# Altium PCB ZZ201PV02.PCBDOC
Units mil, origin at the board's own origin, x right, y up, seen from the top; angles counter-clockwise.
Board outline 2362.2 x 1771.65 mil, 2 copper layers (Top Layer, Bottom Layer); 60 components, 62 nets, 272 pads, 133 vias.
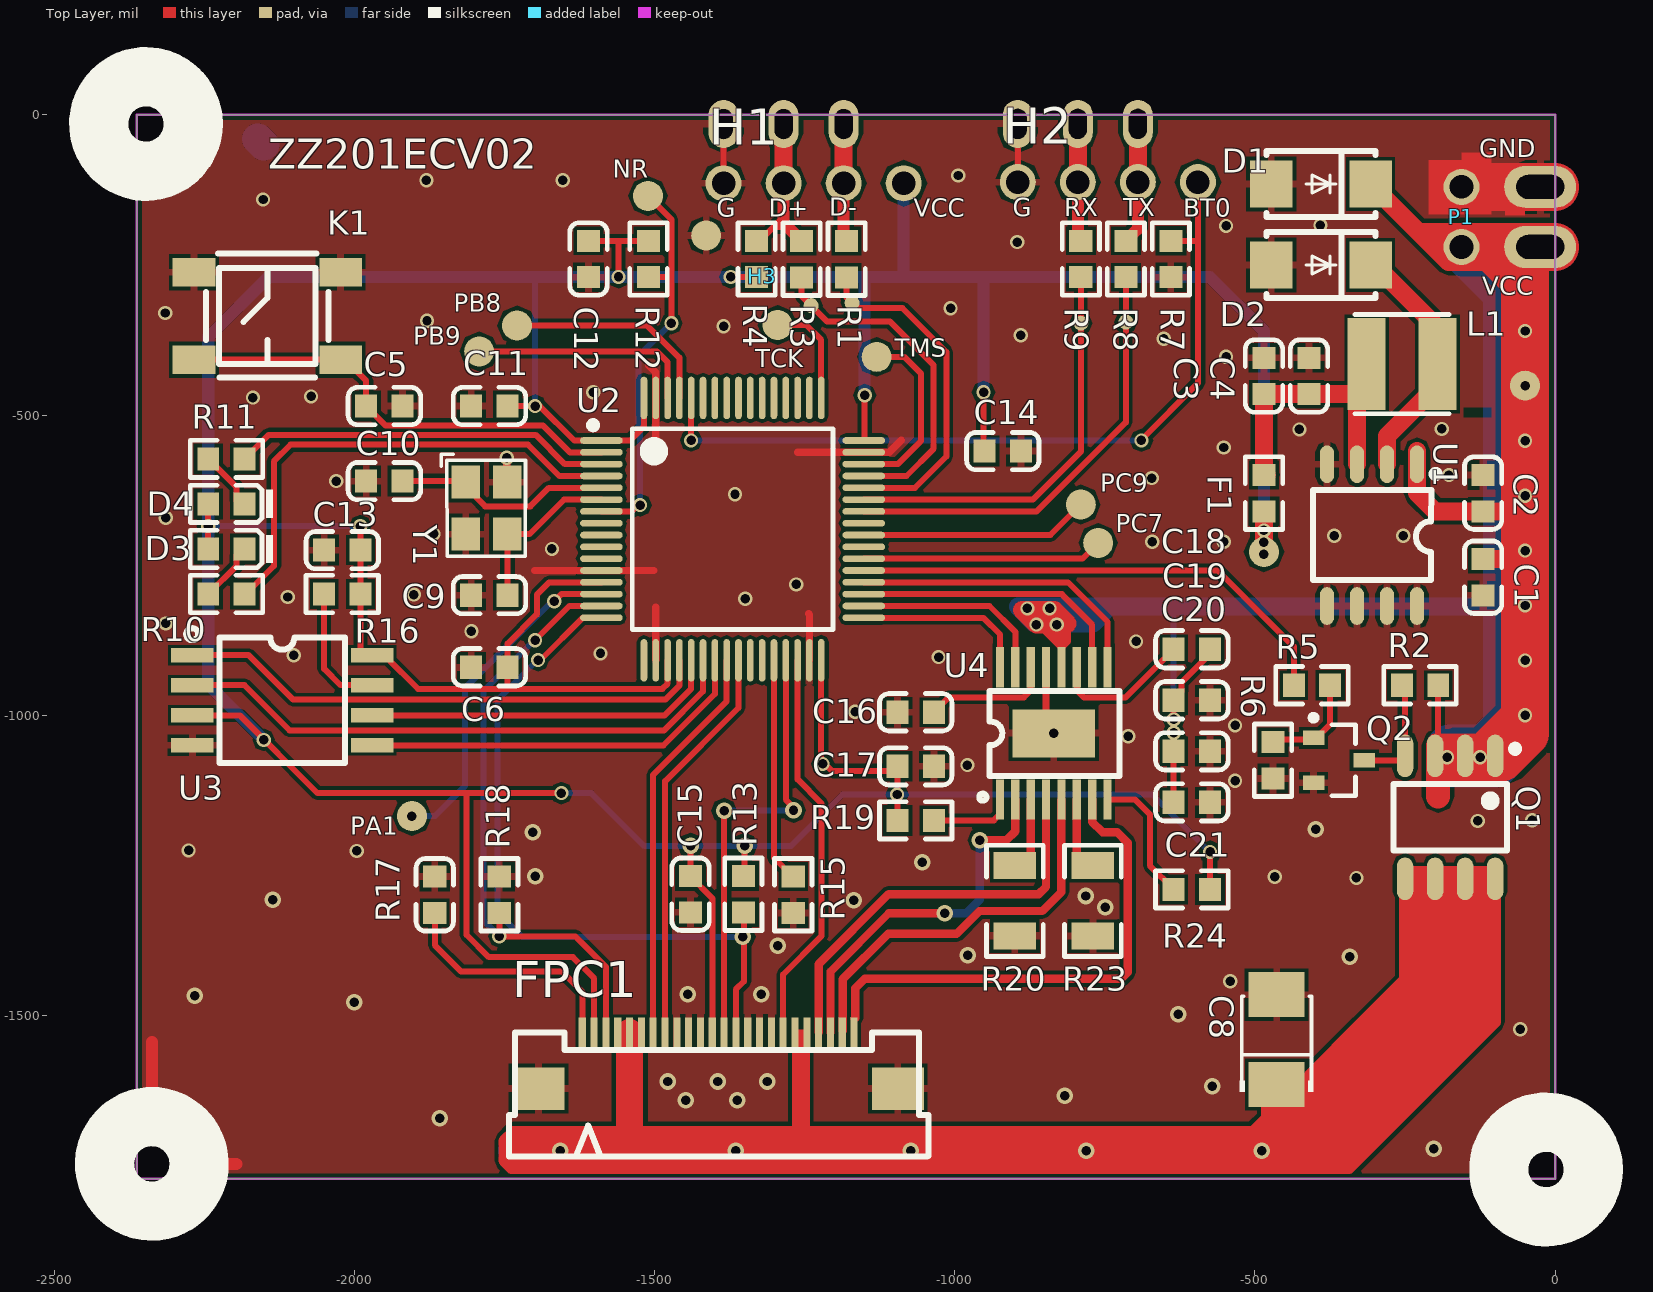
[diagram p0: Top Layer view]
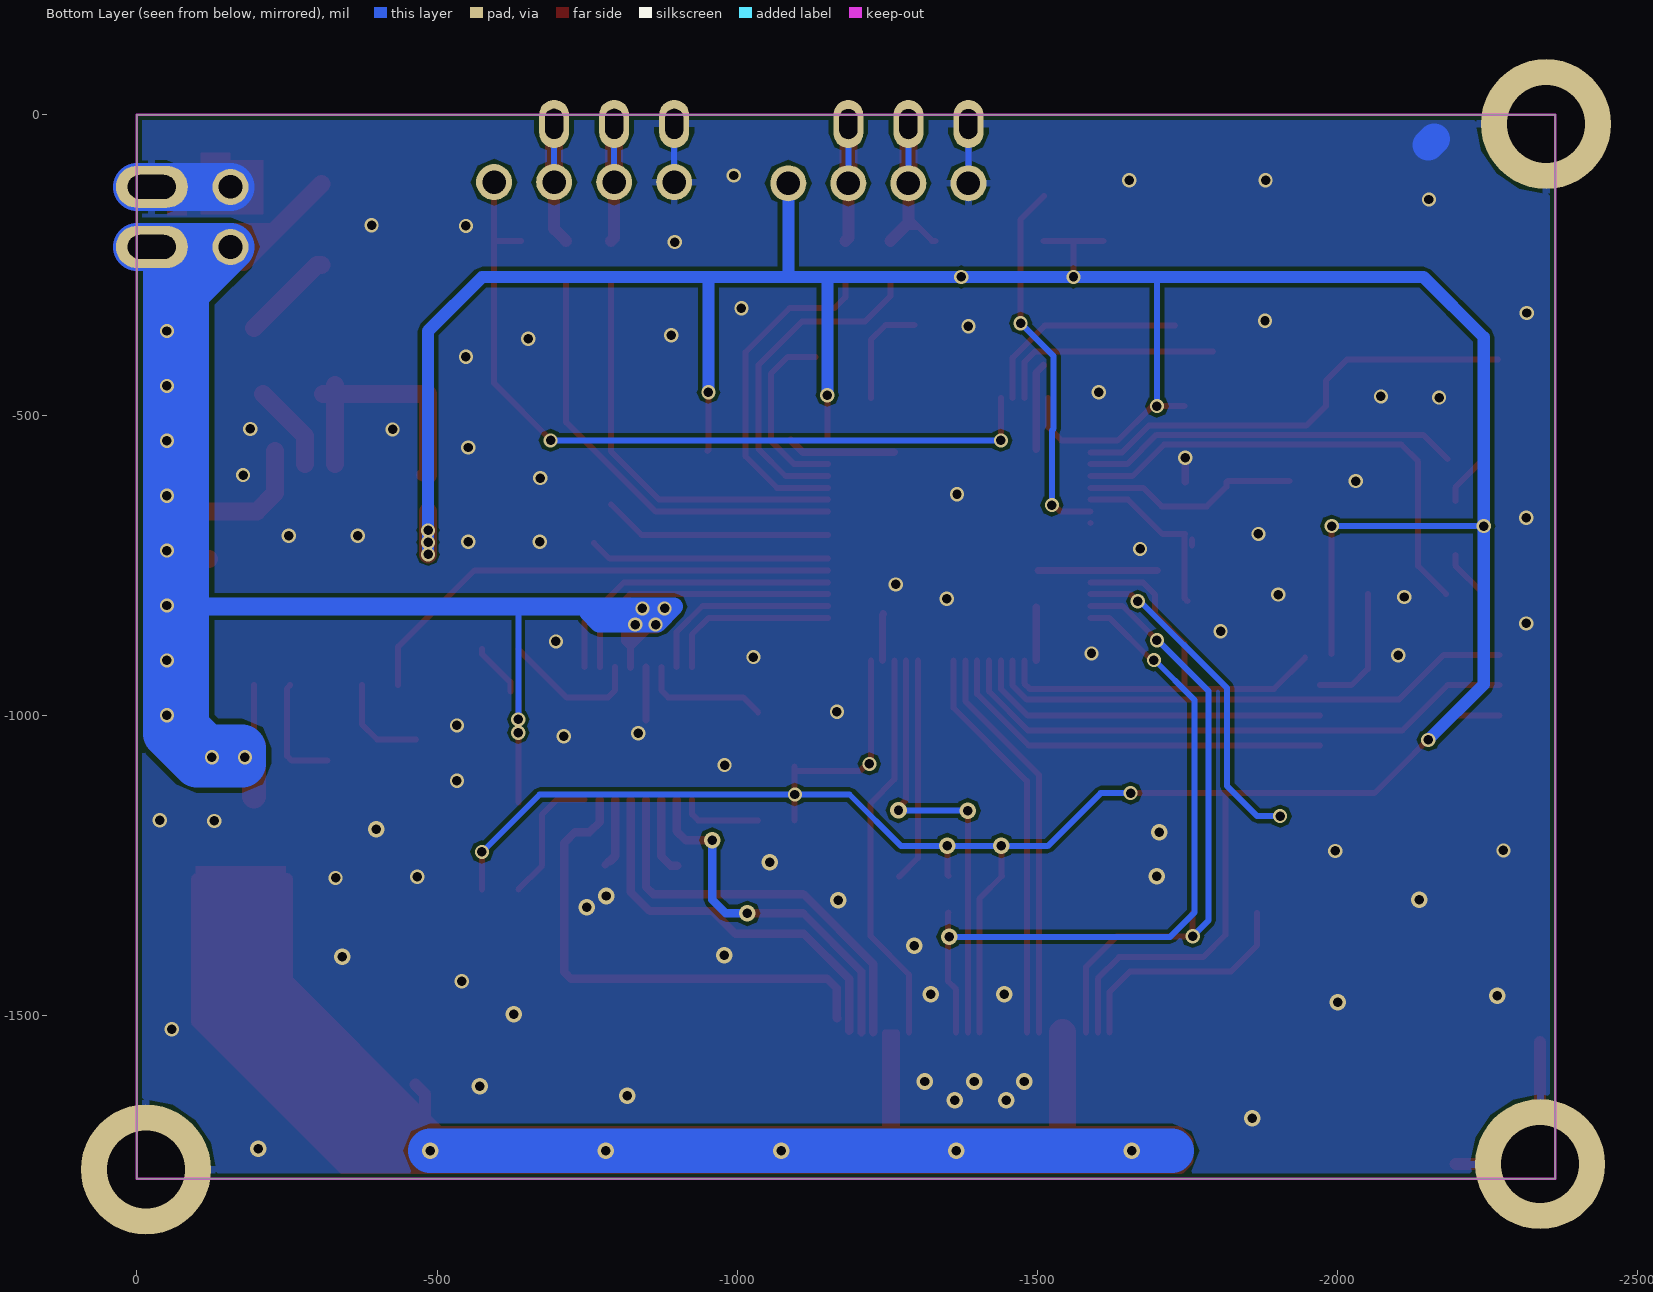
[diagram p1: Bottom Layer view, seen from below]

## Layer stack, top to bottom
Top Layer: signal copper 1.4
Dielectric: dielectric 12.6, FR-4, Dk 4.8
Bottom Layer: signal copper 1.4

## Board outline
-2362.2,-1771.65 -2362.2,0 0,0 0,-1771.65

## Design rules (kind name [scope] priority, off if disabled: settings)
Clearance [All] p1: gap=6
ComponentClearance [All] p1 off: gap=10 collisioncheckmode=3 verticalgap=10
DiffPairsRouting DiffPair_DiffPairsRouting_3 [InDifferentialPair ('NewDifferentialPair1')] p1: maxlimit=10 minlimit=10 mostfreqgap=10 maxuncoupledlength=500
DiffPairsRouting DiffPair_DiffPairsRouting_2 [InDifferentialPair ('NewDifferentialPair1')] p2: maxlimit=5 minlimit=5 mostfreqgap=5 maxuncoupledlength=500
DiffPairsRouting DiffPair_DiffPairsRouting_1 [InDifferentialPair ('NewDifferentialPair1')] p3: maxlimit=10 minlimit=10 mostfreqgap=10 maxuncoupledlength=500
DiffPairsRouting DiffPairsRouting_2 [InDifferentialPair ('NewDifferentialPair1')] p4: maxlimit=10 minlimit=10 mostfreqgap=10 maxuncoupledlength=500
DiffPairsRouting DiffPair_DiffPairsRouting [InDifferentialPair ('NewDifferentialPair1')] p5: maxlimit=10 minlimit=10 mostfreqgap=10 maxuncoupledlength=500
DiffPairsRouting DiffPairsRouting_1 [InDifferentialPair ('NewDifferentialPair1')] p6: maxlimit=10 minlimit=10 mostfreqgap=10 maxuncoupledlength=500
DiffPairsRouting [All] p7: maxlimit=10 minlimit=10 mostfreqgap=10 maxuncoupledlength=500
HoleSize Testpoint [All] p2: absolutevalues=TRUE maxlimit=100 minlimit=1 maxpercent=80.000 minpercent=20.000
HoleSize TestPointUsage [All] p3: absolutevalues=TRUE maxlimit=100 minlimit=1 maxpercent=80.000 minpercent=20.000
MatchedLengths DiffPair_MatchedLengths_3 [InDifferentialPair ('NewDifferentialPair1')] p1: tolerance=10000 checknetsindiffpair=TRUE checkdiffpairvsdiffpair=FALSE checkothers=FALSE
MatchedLengths DiffPair_MatchedLengths_2 [InDifferentialPair ('NewDifferentialPair1')] p2: tolerance=10000 checknetsindiffpair=TRUE checkdiffpairvsdiffpair=FALSE checkothers=FALSE
MatchedLengths DiffPair_MatchedLengths_1 [InDifferentialPair ('NewDifferentialPair1')] p3: tolerance=10000 checknetsindiffpair=TRUE checkdiffpairvsdiffpair=FALSE checkothers=FALSE
MatchedLengths MatchedLengths_1 [InDifferentialPair ('NewDifferentialPair1')] p4: tolerance=1000 checknetsindiffpair=TRUE checkdiffpairvsdiffpair=FALSE checkothers=FALSE
MatchedLengths DiffPair_MatchedLengths [InDifferentialPair ('NewDifferentialPair1')] p5: tolerance=10000 checknetsindiffpair=TRUE checkdiffpairvsdiffpair=FALSE checkothers=FALSE
MatchedLengths [InDifferentialPair ('NewDifferentialPair1')] p6: tolerance=1000 checknetsindiffpair=TRUE checkdiffpairvsdiffpair=FALSE checkothers=FALSE
PolygonConnect PolygonConnect_1 [InNet('GND') vs IsVia] p1: connectstyle=Direct reliefconductorwidth=10 reliefentries=4 polygonreliefangle="90 Angle"
PolygonConnect [All] p2: connectstyle=Relief reliefconductorwidth=12 reliefentries=4 polygonreliefangle="90 Angle"
RoutingVias [All] p1: holewidth=16 width=26 viastyle="Through Hole" minholewidth=16 minwidth=24 maxholewidth=50 maxwidth=100
SolderMaskExpansion [All] p1: expansion=4
TestPointUsage FabricationTestPointUsage [All] p1: valid=0 allowmultiple=FALSE
Testpoint FabricationTestpoint [All] p1: side=3 testpointundercomponent=TRUE minsize=40 maxsize=100 preferedsize=60 minholesize=0 maxholesize=40 preferedholesize=32 testpointgrid=1 style=297 order=0-112345678
Width DiffPair_Width_3 [InDifferentialPair('NewDifferentialPair1')] p1: maxlimit=5 minlimit=5 preferedwidth=5
Width DiffPair_Width_2 [InDifferentialPair('NewDifferentialPair1')] p2: maxlimit=5 minlimit=5 preferedwidth=5
Width DiffPair_Width_1 [InDifferentialPair('NewDifferentialPair1')] p3: maxlimit=5 minlimit=5 preferedwidth=5
Width Width_2 [InDifferentialPair('NewDifferentialPair1')] p4: maxlimit=10 minlimit=10 preferedwidth=10
Width DiffPair_Width [InDifferentialPair('NewDifferentialPair1')] p5: maxlimit=5 minlimit=5 preferedwidth=5
Width Width_1 [InDifferentialPair('NewDifferentialPair1')] p6: maxlimit=10 minlimit=10 preferedwidth=10
Width [All] p7: maxlimit=100 minlimit=2 preferedwidth=6
17 further rules are at their usual default settings.

## Components (designator, comment, footprint, x,y, rotation, side; value= is the part's Value field where it differs from the comment)
C1 "10uF" 0603_C -120,-770 r270 top
C2 "100nF" 0603_C -120,-630 r90 top
C3 "100nF" 0603_C -485,-435 r90 top
C4 "10uF" 0603_C -410,-435 r90 top
C5 "100nF" 0603_C -1950,-485 r0 top
C6 "100nF" 0603_C -1775,-920 r0 top
C8 "220uF" CASE-B_3528 -445,-1508 r270 top
C9 "20pF" 0603_C -1775,-800 r0 top
C10 "20pF" 0603_C -1950,-610 r0 top
C11 "100nF" 0603_C -1775,-485 r0 top
C12 "100nF" 0603_C -1610,-240 r90 top
C13 "100nF" 0603_C -2020,-725 r0 top
C14 "100nF" 0603_C -920,-560 r180 top
C15 "100nF" 0603_C -1440,-1298 r90 top
C16 "2.2uF" 0603_C -1065,-995 r180 top
C17 "100nF" 0603_C -1065,-1085 r180 top
C18 "10nF" 0603_C -605,-890 r0 top
C19 "10uF" 0603_C -605,-975 r180 top
C20 "10uF" 0603_C -605,-1060 r180 top
C21 "100nF" 0603_C -605,-1145 r180 top
D1 "SS34" SMA_L4.4-W2.8-LS5.4-RD -390,-115 r180 top
D2 "SS34" SMA_L4.4-W2.8-LS5.4-RD -390,-250 r180 top
D3 "绿灯 0603" 0603_LED_S1 -2213,-723 r180 top
D4 "红灯 0603" 0603_LED_S1 -2213,-648 r180 top
F1 "0.5A" 0603_R -485,-630 r90 top
FPC1 "afc07-s24eca-00" FPC-SMD_24P-P0.50_F0500WR-S-24PNLNG1GB0R -1394,-1575 r0 top (schematic designator FPC?)
H1 "77311-462K05LF" "PCBComponent_1 - duplicate" -1200,-114 r180 top
H2 "77311-462K05LF" "PCBComponent_1 - duplicate" -710,-112 r180 top
H3 "77311-462K05LF" 5P_1.25 -1765,-195 r0 top
K1 "SW-SPST-4" KEY-SMD_4P-L5.2-W5.2-P3.70-LS6.4 -2145,-335 r180 top
L1 "4040-47uH" IND-SMD_L4.0-W4.0_FNR40XXS -255,-415 r0 top
P1 "Header-Female-2.54_1x2" 2P-P2.54-V -155,-120 r270 top
Q1 "NCE30P12S" SOIC-8_150mil -175,-1170 r180 top
Q2 "AO3402" SOT-23 -360,-1075 r0 top
R1 "20Ω" 0603_R -1180,-240.31 r270 top
R2 "47KΩ" 0603_R -225,-950 r0 top
R3 "20Ω" 0603_R -1255,-240.31 r270 top
R4 "1.5KΩ" 0603_R -1330,-240 r90 top
R5 "1KΩ" 0603_R -405,-950 r180 top
R6 "4.7KΩ" 0603_R -470,-1075 r90 top
R7 "4.7KΩ" 0603_R -640,-240 r270 top
R8 "20Ω" 0603_R -715,-240 r270 top
R9 "20Ω" 0603_R -790,-240 r270 top
R10 "2.2KΩ" 0603_R -2213,-798 r0 top
R11 "470Ω" 0603_R -2213,-573 r0 top
R12 "4.7KΩ" 0603_R -1510,-240 r270 top
R13 "56KΩ" 0603_R -1352,-1298 r90 top
R15 "4.7KΩ" 0603_R -1269,-1299 r90 top
R16 "4.7KΩ" 0603_R -2020,-798 r0 top
R17 "220Ω" 0603_C -1866,-1299 r270 top
R18 "30KΩ" 0603_R -1758.5,-1299 r90 top
R19 "10KΩ" 0603_R -1065,-1175 r180 top
R20 "0.4Ω 1%" 1206_r -900,-1309 r270 top
R23 "0.4Ω 1%" 1206_R -770,-1309 r270 top
R24 "10KΩ" 0603_R -605,-1290 r0 top
U1 "XL1509-3.3E1" SOP-8_L4.9-W3.9-P1.27-LS6.0-BL -305,-700 r180 top
U2 "STM32F103RET6" LQFP-64_L10.0-W10.0-P0.50-LS12.0-BL -1370,-690 r270 top locked
U3 "GT23L24M0140" SOP-8_L5.3-W5.3-P1.27-LS8.0-BL -2120,-975 r270 top
U4 "PT5139-HT-TP" HTSSOP-16_L5.0-W4.4-P0.65-LS6.4-BL-EP -835,-1030 r0 top
Y1 "8MHz" XT_3225_4 -1790,-645 r270 top

## Footprints (in the part's own frame and the unit in brackets; to place one, negate y for a bottom-side part, rotate by r counter-clockwise, add the part's x,y. Pads: shape width x height; smd on the part's side, far side on the other; paste and mask are expansions set on the pad)
2P-P2.54-V [mil]
  round 60 hole 39.37: 1(0,-1) 2(100,-1)
5P_1.25 [mil]
  round 50 smd paste+0 mask+1.97: 1(254,60) 2(470,-155) 3(351,-6) 4(635,-208)
0603_C [mm]
  rect 0.93x0.98 smd: 1(-0.77,0) 2(0.77,0)
  silkscreen extent -1.53,-0.79 1.54,0.79, body extent -0.8,-0.4 0.8,0.4, height 0.3
0603_LED_S1 [mm]
  rect 0.93x0.98 smd: A(0.77,0) K(-0.77,0)
  silkscreen extent -1.98,-0.79 1.54,0.79, body extent -0.8,-0.4 0.8,0.4, height 0.6
0603_R [mm]
  rect 0.93x0.98 smd: 1(-0.77,0) 2(0.77,0)
  silkscreen extent -1.53,-0.79 1.54,0.79, body extent -0.85,-0.4 0.85,0.4, height 0.56
1206_r [mm]
  rect 1.13x1.8 smd: 1(-1.49,0) 2(1.49,0)
  silkscreen extent -2.36,-1.2 2.35,1.2, body extent -1.7,-0.86 1.65,0.87, height 0.85
1206_R [mm]
  rect 1.13x1.8 smd: 1(-1.49,0) 2(1.49,0)
  silkscreen extent -2.36,-1.2 2.35,1.2, body extent -1.7,-0.86 1.65,0.87, height 0.85
CASE-B_3528 [mm]
  rect 1.9x2.376 smd: 1(2.715,-0.48) 2(-1.082,-0.48)
  silkscreen extent -1.01,-2.03 3.02,1.07
FPC-SMD_24P-P0.50_F0500WR-S-24PNLNG1GB0R [mm]
  rect 0.3x1.25 smd: 1(-5.75,1.187) 2(-5.25,1.187) 3(-4.75,1.187) 4(-4.25,1.187) 5(-3.75,1.187) 6(-3.25,1.187) 7(-2.75,1.187) 8(-2.25,1.187) 9(-1.75,1.187) 10(-1.25,1.187) 11(-0.75,1.187) 12(-0.25,1.187) 13(0.25,1.187) 14(0.75,1.187) 15(1.25,1.187) 16(1.75,1.187) 17(2.25,1.187) 18(2.75,1.187) 19(3.25,1.187) 20(3.75,1.187) 21(4.25,1.187) 22(4.75,1.187) 23(5.25,1.187) 24(5.75,1.187)
  rect 2.202x1.798 smd: 25(7.6,-1.187) 26(-7.6,-1.187)
  silkscreen extent -8.85,-4.06 8.89,1.19
HTSSOP-16_L5.0-W4.4-P0.65-LS6.4-BL-EP [mm]
  rect 0.35x1.7 smd: 1(-2.28,-2.804) 2(-1.629,-2.804) 3(-0.979,-2.804) 4(-0.329,-2.804) 5(0.321,-2.804) 6(0.971,-2.804) 7(1.621,-2.804) 8(2.271,-2.804) 9(2.272,2.796) 10(1.624,2.796) 11(0.974,2.796) 12(0.324,2.796) 13(-0.326,2.796) 14(-0.977,2.796) 15(-1.627,2.796) 16(-2.277,2.796)
  rect 3.5x2.032 smd: 17(0,0)
  silkscreen extent -3.15,-2.85 2.77,1.8
IND-SMD_L4.0-W4.0_FNR40XXS [mm]
  rect 1.6x3.9 smd: 1(-1.5,0) 2(1.5,0)
  silkscreen extent -2,-2.1 2,2.1
KEY-SMD_4P-L5.2-W5.2-P3.70-LS6.4 [mm]
  rect 1.8x1.2 smd: 1(-3.1,1.85) 2(3.1,1.85) 3(-3.1,-1.85) 4(3.1,-1.85)
  silkscreen extent -2.6,-2.65 2.6,2.6
LQFP-64_L10.0-W10.0-P0.50-LS12.0-BL [mm]
  oval 0.28x1.8 smd: 1(-3.75,-5.55) 2(-3.25,-5.55) 3(-2.75,-5.55) 4(-2.25,-5.55) 5(-1.75,-5.55) 6(-1.25,-5.55) 7(-0.75,-5.55) 8(-0.25,-5.55) 9(0.25,-5.55) 10(0.75,-5.55) 11(1.25,-5.55) 12(1.75,-5.55) 13(2.25,-5.55) 14(2.75,-5.55) 15(3.25,-5.55) 16(3.75,-5.55) 33(3.75,5.55) 34(3.25,5.55) 35(2.75,5.55) 36(2.25,5.55) 37(1.75,5.55) 38(1.25,5.55) 39(0.75,5.55) 40(0.25,5.55) 41(-0.25,5.55) 42(-0.75,5.55) 43(-1.25,5.55) 44(-1.75,5.55) 45(-2.25,5.55) 46(-2.75,5.55) 47(-3.25,5.55) 48(-3.75,5.55)
  oval 1.8x0.28 smd: 17(5.55,-3.75) 18(5.55,-3.25) 19(5.55,-2.75) 20(5.55,-2.25) 21(5.55,-1.75) 22(5.55,-1.25) 23(5.55,-0.75) 24(5.55,-0.25) 25(5.55,0.25) 26(5.55,0.75) 27(5.55,1.25) 28(5.55,1.75) 29(5.55,2.25) 30(5.55,2.75) 31(5.55,3.25) 32(5.55,3.75) 49(-5.55,3.75) 50(-5.55,3.25) 51(-5.55,2.75) 52(-5.55,2.25) 53(-5.55,1.75) 54(-5.55,1.25) 55(-5.55,0.75) 56(-5.55,0.25) 57(-5.55,-0.25) 58(-5.55,-0.75) 59(-5.55,-1.25) 60(-5.55,-1.75) 61(-5.55,-2.25) 62(-5.55,-2.75) 63(-5.55,-3.25) 64(-5.55,-3.75)
  silkscreen extent -4.55,-6.05 4.25,4.25
"PCBComponent_1 - duplicate" [mil]
  round 60 hole 39.37: 1(-115,0) 2(-15,0) 3(85,0) 4(185,0)
SMA_L4.4-W2.8-LS5.4-RD [mm]
  rect 1.8x2 smd: 1(2.1,0) 2(-2.1,0)
  silkscreen extent -2.3,-1.4 2.3,1.4
SOIC-8_150mil [mm]
  oval 0.7x1.8 smd: 1(-1.905,-2.6) 2(-0.635,-2.6) 3(0.635,-2.6) 4(1.905,-2.6) 5(1.905,2.6) 6(0.635,2.6) 7(-0.635,2.6) 8(-1.905,2.6)
  silkscreen extent -2.9,-3.05 2.4,1.4
SOP-8_L4.9-W3.9-P1.27-LS6.0-BL [mm]
  oval 0.6x1.598 smd: 1(-1.905,-3) 2(-0.635,-3) 3(0.635,-3) 4(1.905,-3) 5(1.905,3) 6(0.635,3) 7(-0.635,3) 8(-1.905,3)
  silkscreen extent -2.84,-2.74 2.5,1.9
SOP-8_L5.3-W5.3-P1.27-LS8.0-BL [mm]
  rect 0.599x1.8 smd: 1(-1.905,-3.8) 2(-0.635,-3.8) 3(0.635,-3.8) 4(1.905,-3.8) 5(1.905,3.8) 6(0.635,3.8) 7(-0.635,3.8) 8(-1.905,3.8)
  silkscreen extent -3.05,-4.06 2.65,2.65
SOT-23 [mm]
  rect 0.914x0.6 smd: 1(-1.075,0.95) 2(-1.075,-0.95) 3(1.075,0)
  silkscreen extent -1.2,-1.5 0.7,1.92
XT_3225_4 [mm]
  rect 1.4x1.2 smd: 1(-0.846,-0.621) 2(1.354,-0.621) 3(1.354,1.129) 4(-0.846,1.129)
  silkscreen extent -2.03,-1.65 2.29,1.91

## Part data
C1 C19 C20: library part "0805 10uF (106) 10% 25V", "贴片电容"
C2 C3 C4 C5 C6 C11 C12 C13 C14 C15 C17 C21: library part "0603 100nF (104) 10% 50V", "贴片电容"
C8: library part 10uF
C9 C10: library part "0603 10pF (100) 5% 50V", "贴片电容"
C16: library part "0805 2.2uF (225) 20% 50V", "贴片电容"
C18: library part "0603 10nF (103) 10% 50V", "贴片电容"
D1: library part "SMA(DO-214AC) M7", "二极管"
D2: library part "SOD-323 1N4148WS T4", "二极管"
D3: library part "0603 绿灯", "发光二极管"
D4: library part "0603 红灯", "发光二极管"
F1: library part Res1, "Resistor"
FPC1: "锁定特性:抽屉式;触点类型:上接;触点数量:24P;间距:0.5mm;安装类型:卧贴;"
L1: library part Inductor, "Inductor"
Q1: library part AO4407A, "MOS(场效应管)"
Q2: library part "AO3400A N道沟 X0YV1T SOT-23", "MOS(场效应管)"
R1 R3 R4 R8 R9: library part "0603 100Ω (1000) 1%", "贴片电阻"
R2: library part "0603 47KΩ (4702) 1%", "贴片电阻"
R5: library part "0603 470Ω (4700) 1%", "贴片电阻"
R6 R7 R12 R15 R16: library part "0603 4.7KΩ (4701) 1%", "贴片电阻"
R10 R11: library part "0603 2KΩ (2001) 1%", "贴片电阻"
R13 R19 R24: library part "0603 10KΩ (1002) 1%", "贴片电阻"
R17: library part "0603 200Ω (2000) 1%", "贴片电阻"
R18: library part "0603 30KΩ (3002) 1%", "贴片电阻"
R20 R23: library part Res, "Resistor"
U3: library part GD25Q64CSIG
Y1: library part XTAL_4, "Crystal Oscillator"

## Free pads (board coordinates)
  round 216.54 hole 129.92: 0(-2347.05,-15.15) 0(-2337.23,-1747.65) 0(-15.15,-1756.5)
  oval 50x80 hole 30 slot 50 at 90 deg: 0(-1385,-15.31) 0(-1285,-15.31) 0(-1185,-15.31) 0(-895,-15) 0(-795,-15) 0(-695,-15)
  round 50 smd: 1(-1904,-1168) 2(-1729,-351) 3(-1792,-394) 4(-790,-649) 5(-761,-713) 11(-485,-728) 14(-50,-451)
  oval 120x70 hole 40 slot 80 at 0 deg: 1(-25,-220) 1(-25,-120)
  round 25 smd: 7(-1239.25,-317.75) 8(-1170.82,-313.18) 9(-790,-347) 10(-715,-345)

## Via types
v1: diameter 23.62, hole 15.75, Top Layer to Bottom Layer, 96 vias
v2: diameter 27.56, hole 15.75, Top Layer to Bottom Layer, 37 vias

## Nets (pads, with @x,y where several pads share a name; then routed paths per layer and width w, separated by ;. In a path a pad name is that pad's centre, name@x,y a point inside that pad or via, vN(x,y) a via of type N, cw(c..) or ccw(c..) an arc to the next point about the centre after c; other vN are vias at no path point)
ADC_PAPER: FPC1.3 R18.1 U2.15 | length 1022.1
  Top Layer w10: R18.1 v1(-1758.5,-1368.21) -1631.79,-1368.21 -1581,-1418.99 FPC1.3 ; v1@-1697,-877 -1697,-873 -1641.95,-817.95 U2.15
  Bottom Layer w10: v1(-1758.5,-1368.21) -1785,-1341.71 -1785,-960 v1@-1699.5,-874.5
  other v1: -1699,-875
ADC_TM: FPC1.14 R13.1 U2.16 | length 1214.6
  Top Layer w10: v1@-1695,-908 v1(-1694,-908) -1690,-908 -1619.64,-837.64 U2.16 ; FPC1.14 -1364.48,-1456.46 -1351.08,-1443.06 -1351.08,-1329.24 R13.1
  Bottom Layer w10: v1@-1695,-908 -1761.26,-974.26 -1761.26,-1328.67 -1720.93,-1369 v2(-1353,-1369)
BOOT0: H2.1 R7.1 U2.60 | length 1340.6
  Top Layer w10: v1(-1439,-542.2) -1438.9,-542.1 U2.60 ; v1(-689,-542.2) -689,-541 -595,-447 H2.1@-595,-105 ; R7.1 -596.31,-209.69
  Bottom Layer w10: v1(-1439,-542.2) v1(-689,-542.2)
BOOT1: R15.2 U2.28 | length 374.1
  Top Layer w10: U2.28 -1301.1,-1237.57 -1269.98,-1268.68 R15.2
D+: pad.7 R3.2 U2.45 | length 573.3
  Top Layer w10: R3.2 -1255,-302 -1213,-344 -1108,-344 -1035,-417 -1035,-556 -1080.42,-601.42 U2.45
D-: pad.8 R1.2 U2.44 | length 570.1
  Top Layer w10: R1.2 -1180,-304 -1162,-322 -1087,-322 -1014,-395 -1014,-569 -1066.1,-621.1 U2.44
EN_VH: R5.2 U2.37 | length 833
  Top Layer w10: U2.37 -562.1,-758.9 -435.32,-885.68 R5.2
FB: C3.1 C4.1 F1.2 L1.1 U1.3 | length 450.6
  Top Layer w20: F1.2 F1.2@-475.32,-599.68
  Top Layer w30: F1.2 C3.1 L1.1@-310.32,-465.31 ; U1.3 L1.1@-330,-450
FLASH_CLK: U2.21 U3.6 | length 597.2
  Top Layer w10: U3.6 -1483,-1000 -1438.9,-955.9 U2.21
FLASH_CS: U2.20 U3.1 | length 893.5
  Top Layer w10: U3.1 -2176,-900 -2102,-974 -1482,-974 -1458.58,-950.58 U2.20
FLASH_MISO: U2.22 U3.2 | length 960
  Top Layer w10: U3.2 -2183,-950 -2108,-1025 -1484,-1025 -1419.21,-960.21 U2.22
FLASH_MOSI: U2.23 U3.5 | length 662.3
  Top Layer w10: U3.5 -1485,-1050 -1399.53,-964.53 U2.23
GND: C1.2 C2.2 C3.2 C4.2 C5.2 C6.1 C8.2 C9.1 C10.1 C11.1 C12.1 C13.1 C14.1 C15.1 C16.2 C17.1 C19.1 C20.1 C21.1 D1.1 D2.1 FPC1.9 FPC1.10 FPC1.11 FPC1.15 FPC1.16 FPC1.17 FPC1.25 FPC1.26 H1.4 H2.4 H3.3 K1.3 K1.4 P1.1 pad.0@-15.15,-1756.5 pad.0@-895,-15 pad.0@-1385,-15.31 pad.0@-2337.23,-1747.65 pad.0@-2347.05,-15.15 pad.1@-25,-120 Q2.2 R6.1 R7.2 R15.1 R17.1 R18.2 R20.2 R23.2 U1.4 U1.5 U1.6 U1.7 U1.8 U2.12 U2.18 U2.31 U2.47 U2.63 U3.4 U4.13 U4.17 Y1.2 Y1.4 | length 1890.1
  Top Layer w10: H1.4@-1385,-105.31 -1385,-15.31 pad.0@-1385,-0.31 ; H2.4@-895,-105 -895,-15 pad.0@-895,0
  Top Layer w12: v1(-1746,-571) -1746,-611.24 Y1.4 ; -1700.1,-758.9 U2.12 -1500.9,-758.9 ; -1510,-417 -1497.95,-429.05 U2.63 -1497.95,-556.95 ; U2.18 -1497.95,-819.95 ; -1261.95,-562.05 U2.47 -1109.05,-562.05 -1089,-542 ; -1243,-831 -1242.05,-831.95 U2.31 ; U4.17@-847.85,-1007.85 U4.13
  Top Layer w20: pad.0@-2337.23,-1747.65 -2196.68,-1747.65 ; pad.0@-2337.23,-1747.22 -2337.23,-1544.49
  Top Layer w80: P1.1 -25,-120 pad.1@0,-120
  Bottom Layer w10: H1.4@-1385,-105.31 -1385,-15.31 pad.0@-1385,-10.31 ; H2.4@-895,-105 -895,-15 pad.0@-895,-10
  Bottom Layer w52: -2161,-40 -2151,-50
  Bottom Layer w80: P1.1 -25,-120 pad.1@0,-120
  other v1: -58,-1523 -541,-1443 -331,-1271 -467,-1269 -1996,-1226 -2276,-1225 -129,-1176 -38,-1175 -533,-1109 -979,-1083 -711,-1035 -835,-1030 -533,-1017 -1166,-994 -1027,-903 -2101,-900 -1590,-897 -698,-877 -1805,-860 -2314,-847 -1349,-806 -2111,-803 -1901,-799 -1264,-782 -1671,-723 -671,-711 -552,-711 -368,-701 -253,-701 -1868,-698 -2314,-671 -1366,-632 -2030,-610 -672,-605 -177,-600 -552,-554 -426,-524 -189,-523 -2169,-471 -2072,-469 -1602,-462 -548,-403 -652,-373 -890,-367 -1385,-352 -1879,-343 -2315,-330 -1007,-322 -896,-212 -548,-185 -391,-184 -2152,-141 -1880,-109 -1653,-109 -994,-101
  other v2: -202,-1722 -1858,-1671 -1448,-1641 -1362.33,-1641 -817,-1634 -571,-1618 -1478,-1610 -1395,-1610 -1312,-1610 -628,-1498 -2000,-1478 -2266,-1467 -1444.9,-1464.88 -1322,-1465 -342,-1402 -978,-1400 -1295,-1384 -749,-1320 -1168,-1308 -2136,-1307 -782,-1301 -1699,-1268 -1054,-1245 -1703,-1195 -399,-1190
H_S: U2.17
KEY: C5.1 K1.1 K1.2 U2.2 | length 767.2
  Top Layer w10: K1.2 -2015.17,-407.83 -1980.32,-442.69 C5.1 -1948.32,-517 -1686,-517 -1640.95,-562.05 U2.2
LED_G: R10.2 U2.4 | length 819.1
  Top Layer w10: R10.2@-2180.68,-798 -2134,-751.32 -2134,-577 -2106,-549 -1711,-549 -1658.58,-601.42 U2.4
LED_R: R11.2 U2.3 | length 630.9
  Top Layer w10: R11.2 -2142.68,-533 -1698,-533 -1649.27,-581.73 U2.3
MOTOR_A: FPC1.22 U4.2 | length 616.7
  Top Layer w13: FPC1.22 -1207,-1426.99 -1110,-1330
  Top Layer w14: -1110,-1330 v2(-1017,-1330) ; v2(-958,-1208) -914,-1208 -899.13,-1193.13 U4.2
  Bottom Layer w14: v2(-1017,-1330) -981,-1330 -958,-1307 v2(-958,-1208)
MOTOR_A\: FPC1.21 U4.4 | length 691.2
  Top Layer w14: FPC1.21 -1226.67,-1414.68 -1110,-1298 -860,-1298 -847.95,-1285.95 U4.4
MOTOR_B: FPC1.24 U4.7 | length 841.8
  Top Layer w14: FPC1.24@-1166.53,-1505 -1166,-1504.47 -1166,-1455 -1150,-1439 -723,-1439 -711.96,-1427.96 -711.96,-1212.31 -729.51,-1194.76 -753.88,-1194.76 -771.18,-1177.46 U4.7
MOTOR_B\: FPC1.23 U4.5 | length 664.2
  Top Layer w14: FPC1.23@-1186.72,-1525.4 -1186.72,-1439.72 -1111,-1364 -997,-1364 -959,-1326 -854,-1326 -822.36,-1294.36 U4.5
MOTOR_CPU_A: U2.33 U4.16 | length 292.9
  Top Layer w10: U2.33 -952.36,-837.64 -924.65,-865.35 U4.16
MOTOR_CPU_A\: U2.34 U4.15 | length 329.2
  Top Layer w10: U2.34 -942.05,-817.95 -899.05,-860.95 U4.15
MOTOR_CPU_B: U2.36 U4.9 | length 508.7
  Top Layer w10: U2.36 -811.42,-778.58 -745.55,-844.45 U4.9
MOTOR_CPU_B\: U2.35 U4.10 | length 472.4
  Top Layer w10: U2.35 -821.73,-798.27 -771.05,-848.95 U4.10
NetC16_1: C16.1 U4.14 | length 214.9
  Top Layer w10: C16.1 -1009.68,-970 -885,-970 -873.45,-958.45 U4.14
NetC18_1: C18.1 U4.11 | length 237.7
  Top Layer w10: U4.11 -796.65,-958.35 -785,-970 -715.32,-970 C18.1
NetD2_2: D2.2 L1.2 U1.2 | length 301.7
  Top Layer w30: D2.2 -300,-250 L1.2@-195,-355 ; U1.2 -280,-535 L1.2@-210,-465
NetD3_K: D3.K R10.1 | length 84.6
  Top Layer w10: R10.1 -2196,-750.69 D3.K@-2196,-733
NetD4_K: D4.K R11.1 | length 89.6
  Top Layer w10: R11.1 -2196,-620.31 D4.K@-2196,-643
NetFPC?_1: FPC1.1 R17.2 | length 399.1
  Top Layer w10: R17.2 -1866,-1383 -1822,-1427 -1654,-1427 -1620.38,-1460.62 FPC1.1
NetH1_2: H1.2 pad.0@-1185,-15.31 R1.1 | length 391.8
  Top Layer w10: H1.2@-1185,-105.31 pad.0@-1185,-15.31
  Top Layer w20: H1.2@-1185,-105.31 -1185,-205 R1.1
  Top Layer w30: H1.2@-1185,-105.31 pad.0@-1185,-15.31
  Bottom Layer w10: H1.2@-1185,-105.31 pad.0@-1185,-0.31
NetH1_3: H1.3 pad.0@-1285,-15.31 R3.1 R4.2 | length 475.5
  Top Layer w10: R4.2 -1324.68,-209.68 -1285,-170 ; -1301.61,-186.61 -1274.61,-186.61 ; H1.3@-1285,-105.31 pad.0@-1285,-15.31
  Top Layer w20: H1.3@-1285,-105.31 -1285,-180 R3.1
  Top Layer w30: H1.3@-1285,-105.31 pad.0@-1285,-15.31
  Bottom Layer w10: H1.3@-1285,-105.31 pad.0@-1285,-15.31
NetH2_2: H2.2 pad.0@-695,-15 R8.1 | length 398
  Top Layer w10: H2.2@-695,-105 pad.0@-695,-15
  Top Layer w20: R8.1 -695,-189.69 H2.2@-695,-105
  Top Layer w30: H2.2@-695,-105 pad.0@-695,-15
  Bottom Layer w10: H2.2@-695,-105 pad.0@-695,0
NetH2_3: H2.3 pad.0@-795,-15 R9.1 | length 398.8
  Top Layer w10: H2.3@-795,-105 pad.0@-795,0
  Top Layer w20: R9.1 -795,-204.69 -795,-105 H2.3@-790,-110
  Top Layer w30: H2.3@-795,-105 pad.0@-795,-20
  Bottom Layer w10: H2.3@-795,-105 pad.0@-795,-10
NetQ2_1: Q2.1 R5.1 R6.2 | length 165.5
  Top Layer w10: R6.2@-465,-1040 -400,-1040 -374.69,-1014.69 R5.1
NetR16_1: R16.1 U3.7 | length 215.9
  Top Layer w10: R16.1 -2050.31,-922.69 -2023,-950 U3.7
NetR19_1: R19.1 U4.1 | length 138.2
  Top Layer w10: R19.1 -935,-1175 -925,-1165 U4.1@-925,-1140.64
NetR20_1: R20.1 U4.3 | length 127.5
  Top Layer w14: R20.1 -888.78,-1250.34 -873.54,-1235.09 U4.3
NetR23_1: R23.1 U4.6 | length 125.6
  Top Layer w12: R23.1@-791.77,-1237.23 -785.89,-1243.11 R23.1@-780,-1249
  Top Layer w14: U4.6 -796.77,-1235.09 -788.75,-1243.11 R23.1@-785.89,-1243.11
NetR24_1: R24.1 U4.8 | length 222.2
  Top Layer w10: U4.8 -699.61,-1140.39 -675,-1165 -675,-1250.31 R24.1
NRST: H3.1 R12.2 U2.7 | length 661.7
  Top Layer w10: U2.7 -1538.07,-660.47 -1527.6,-650 v1(-1524,-650) ; H3.1 -1472,-174 v1(-1472,-347) ; R12.2 -1472.32,-270.32
  Bottom Layer w10: v1(-1524,-650) -1524,-525.66 -1527,-522.66 -1527,-402 v1(-1472,-347)
OSC_IN: C10.2 U2.5 Y1.1 | length 366
  Top Layer w10: C10.2 -1816.15,-610 Y1.1 -1814.45,-619.55 -1782,-652 -1707,-652 -1676.1,-621.1 U2.5
OSC_OUT: C9.2 U2.6 Y1.3 | length 304.7
  Top Layer w10: Y1.3@-1757,-717 Y1.3@-1757,-707 ; C9.2@-1749.68,-810 -1745,-805.31 -1745,-698.86 Y1.3 -1708.31,-698.31 -1650.79,-640.79 U2.6
Q-G: Q1.4 Q2.3 R2.1 | length 190.6
  Top Layer w10: Q2.3 -257.36,-1075 Q1.4 -250,-955.31 R2.1
RXD: pad.9 R9.2 U2.43 | length 685.6
  Top Layer w10: U2.43 -869.79,-640.79 -790,-561 R9.2@-790,-270
STB1: FPC1.13 U2.29 | length 741.4
  Top Layer w10: v2@-1385,-1158 v2(-1384.16,-1158.85) FPC1.13 ; U2.29 -1281.42,-1140.39 -1268.53,-1153.28 v2(-1268.53,-1158.03)
  Bottom Layer w10: v2(-1384.16,-1158.85) -1383.75,-1158.44 -1268.94,-1158.44 v2(-1268.53,-1158.03)
STB2: U2.27
STB3: U2.26
STB4: U2.8 | length 0.3
  Top Layer w10: U2.8 U2.8@-1588.31,-679.97
STB5: U2.9
STB6: U2.10
TCK: H3.2 U2.49 | length 179.7
  Top Layer w10: H3.2 -1247,-350 -1222.36,-374.64 U2.49
TDI: U2.50
TMS: H3.4 U2.46 | length 309.1
  Top Layer w10: U2.46 -1094.73,-581.73 -1056,-543 -1056,-431 -1084,-403 H3.4
TPH_CLK: FPC1.8 U2.25 | length 670.3
  Top Layer w10: FPC1.8@-1482.47,-1528.14 -1482.47,-1109.83 -1360.16,-987.51 U2.25
TPH_DI: FPC1.7 U2.24 | length 670.5
  Top Layer w10: FPC1.7 -1502.26,-1099.12 -1379.84,-976.7 U2.24
TPH_LAT: FPC1.18 U2.30 | length 662.6
  Top Layer w10: FPC1.18 -1285.74,-1431.73 -1222,-1368 -1222,-1146.59 -1261.73,-1106.86 U2.30
TXD: pad.10 R8.2 U2.42 | length 740
  Top Layer w10: U2.42 -863.47,-660.47 -715,-512 R8.2@-715,-270
VDC_IN: C1.1 C2.1 C18.2 C19.2 C20.2 C21.2 D1.2 P1.2 pad.1@-25,-220 pad.14 Q1.1 Q1.2 Q1.3 R2.2 U1.1 U4.12 | length 6224.5
  Top Layer w10: C21.2 C19.2 ; C19.2@-622,-960 -622,-945 -574.69,-897.69 C18.2 ; Q1.3@-194.68,-1059.68 R2.2
  Top Layer w12: v1(-864,-849) -860,-849 U4.12@-822.25,-886.75 ; -835,-873 v1@-835,-849 ; v1@-831,-849 -822.25,-857.75 U4.12 ; -827.35,-868.35 v1@-827.35,-852.65 ; U4.12@-822.25,-887.25 -812,-877 -812,-847
  Top Layer w20: Q1.3@-200,-1100 Q1.2@-145,-1100 ; Q1.3@-200,-1040 Q1.2@-145,-1040
  Top Layer w30: D1.2 -177.32,-245 -80,-245 ; U1.1@-230,-560 -230,-630 -199.68,-660.31 -40.32,-660.31 ; -227.32,-195 -135,-195 ; -125,-230 -125,-235 -60,-300 ; C1.1 -65.32,-739.69 ; v1@-888,-825 v1(-864,-849) -814,-849 -812,-847 -834,-825 v1@-888,-825
  Top Layer w40: -195,-1135 Q1.3@-195,-1050 ; Q1.3@-195,-1075 Q1.3@-190,-1070 ; Q1.2@-140,-1080 v1@-125,-1080
  Top Layer w80: v1@-170,-1070 -90,-1070 -50,-1030 pad.1@-50,-230 ; P1.2 pad.1@0,-220 ; v1@-115,-1070 v1@-50,-1005
  Bottom Layer w10: v1(-635.31,-1029) -635.31,-821.31 -633,-819
  Bottom Layer w30: -751,-828 -770,-847 -867,-847 -895,-819 -83,-819
  Bottom Layer w80: pad.1@-40,-220 -50,-230 -50,-1030 -100,-1080 -175,-1080 -175,-1055 -115,-1055 -80,-1020 -80,-296 P1.2 pad.1@0,-220
  other v1: -180,-1070 -125,-1070 -635.31,-1007 -50,-1000 -50,-908.57 -830,-849 -879,-822 -842,-822 -50,-817.14 -50,-725.71 -50,-634.29 -50,-542.86 -50,-451.43 -50,-360
VDD_3V3: C6.2 C11.2 C12.2 C13.2 C14.2 C15.2 C17.2 D3.A D4.A F1.1 FPC1.2 FPC1.12 H1.1 pad.11 R4.1 R12.1 R13.2 R16.2 R19.2 R24.2 U2.1 U2.13 U2.19 U2.32 U2.48 U2.64 U3.3 U3.8 | length 9109.3
  Top Layer w10: U3.3 -2191,-1000 -2061.31,-1129.69 -1814,-1129.69 ; D3.A v1(-2243.32,-685) D4.A ; -1990,-752.69 v1(-1990,-685) ; U3.8@-1989.69,-898.31 C13.2 ; U3.8@-1946,-904 -1894,-956 -1487,-956 -1478.27,-947.27 U2.19 ; -1744.68,-955.31 C6.2 -1744.68,-880.69 -1696,-832 -1696,-799 -1675.58,-778.58 U2.13 ; C11.2 v1(-1699,-485) -1691,-485 -1633.64,-542.36 U2.1 -1540.36,-542.36 -1517.64,-519.64 U2.64 ; v1(-1655,-1129.69) -1814,-1129.69 ; C12.2 -1560,-209.68 ; FPC1.2 -1600.69,-1438.31 -1636,-1403 -1776,-1403 -1813,-1366 -1813,-1130.69 -1814,-1129.69 ; v1(-1560,-270) -1560,-209.68 ; R12.1 -1560,-209.68 ; v2(-1440,-1217) C15.2 -1440.98,-1267.69 -1403.84,-1304.82 FPC1.12 ; v1(-1373,-270) -1330.31,-270 R4.1 R4.1@-1335,-275.31 ; R13.2 -1350,-1265.68 v2(-1350,-1217) ; U2.32 v1@-1222.36,-1074.64 ; v1(-1220,-1081) -1222.36,-1078.64 v1@-1222.36,-1074.64 ; U2.48@-1150,-540.86 v1(-1150,-467) ; R19.2 C17.2@-1095.32,-1093 ; C17.2 C17.2@-1095.32,-1093 ; v1(-952,-462) -952,-558.31 C14.2 ; R24.2 v1(-574.68,-1227.69) ; v1@-1222.36,-1074.64 -1204,-1093 C17.2@-1095.32,-1093
  Top Layer w30: v1(-485,-732) pad.11 F1.1
  Bottom Layer w10: v1(-2243.32,-685) v1(-1990,-685) ; v1(-1699,-485) -1699,-273 ; v1(-1655,-1129.69) -1605.31,-1129.69 -1517,-1218 -1440,-1218 -1350,-1218 -1273,-1218 -1187,-1132 v1(-1096,-1132) -671,-1132 -575.32,-1227.69 v1(-574.68,-1227.69)
  Bottom Layer w20: v1(-2151,-1041) -2243.32,-948.68 v1(-2243.32,-685) -2243.32,-370.32 -2143,-270 v1(-1560,-270) v1(-1373,-270) -1150,-270 ; v1(-1150,-467) -1150,-270 ; H1.1@-1085,-105.31 -1085,-270 ; v1(-952,-462) -952,-270 ; v1(-485,-732) v1(-485,-712) v1(-485,-692) -485,-360 -575,-270 -952,-270 ; -1150,-270 -1085,-270 ; -1085,-270 -952,-270
VH: C8.1 FPC1.4 FPC1.5 FPC1.6 FPC1.19 FPC1.20 Q1.5 Q1.6 Q1.7 Q1.8 | length 7871.6
  Top Layer w10: -1266.05,-1701.27 -1266.05,-1693.77 FPC1.19 -1256.44,-1528.25 ; -1260.19,-1691.19 FPC1.19@-1260.19,-1529.25 ; -1251.19,-1691.75 FPC1.20@-1251.19,-1529.82 ; -1246.36,-1697.58 -1246.36,-1693.77 FPC1.20 -1256.44,-1528.25 ; -1256.44,-1528.25 -1256.11,-1528.59 ; -1256.11,-1528.59 -1256.11,-1690.52 -1256.11,-1528.59
  Top Layer w20: C8.1 -480,-1631.02 -480,-1671 ; -407,-1712 -425.23,-1693.77 -502.77,-1693.77 ; -296,-1666 -383.65,-1753.65 ; Q1.5 -250,-1441 -480,-1671 ; Q1.8 -100,-1510.73 -342.92,-1753.65 -383.65,-1753.65 ; -502.77,-1693.77 -1246.36,-1693.77 -1266.05,-1693.77 -1541.64,-1693.77 -1734.77,-1693.77 -1750,-1709 -1750,-1741.94 -1738.28,-1753.65 -383.65,-1753.65 ; -502.77,-1693.77 -480,-1671
  Top Layer w22: -1713,-1725.65 -1710.01,-1722.67 ; -927,-1725.65 -927,-1724.15 -922.61,-1719.76
  Top Layer w45: -1541.64,-1706.42 -1541.64,-1693.77 FPC1.5
  Top Layer w70: -1713,-1725.65 v2(-1657,-1725.65) v2(-1365,-1725.65) v2(-1073,-1725.65) -927,-1725.65 v2(-781,-1725.65) v2(-489,-1725.65) -373,-1725.65
  Bottom Layer w74: -1723.79,-1725.65 v2(-1657,-1725.65) v2(-1365,-1725.65) v2(-1073,-1725.65) v2(-781,-1725.65) v2(-489,-1725.65)
pads on no net: U2.11 U2.14 U2.38 U2.39 U2.40 U2.41 U2.51 U2.52 U2.53 U2.54 U2.55 U2.56 U2.57 U2.58 U2.59 U2.61 U2.62
copper on no net: | length 2088.6
  Top Layer w10: -1792,-394 -1496,-394 -1478.27,-411.73 -1478.27,-471.5 ; -1729,-351 -1512,-351 -1458.58,-404.42 -1458.58,-471.5 ; v1(-1667,-810) -1655.27,-798.27 -1588.5,-798.27 ; -1151.5,-739.21 -787.21,-739.21 -761,-713 ; -1151.5,-699.84 -840.84,-699.84 -790,-649
  Bottom Layer w10: v1(-1904,-1168) -1866,-1168 -1816,-1118 -1816,-955 v1@-1668.14,-807.14

## Polygon pours and split planes (outlines as drawn)
GND on Top Layer "GND_L01_P000" (solid, remove dead copper, pour order 0): 0,0 -2362.2,0 -2362.2,-1771.65 0,-1771.65
GND on Bottom Layer "GND_L02_P001" (solid, remove dead copper, pour order 1): 1,0 -2361.2,0 -2361.2,-1771.65 1,-1771.65

## Keep-outs
Keep-Out Layer:
  lines w4: -2362.2,-1771.65 0,-1771.65 ; -2362.2,-1771.65 -2362.2,0 ; -2362.2,-1771.65 0,-1771.65 ; -2362.2,-1771.65 -2362.2,0 ; -2362.2,0 0,0 ; -2362.2,0 0,0 ; 0,-1771.65 0,0 ; 0,-1771.65 0,0

## Other copper
Top Layer:
  rectangle net GND: -83.52,-167.55 -50,-153.52
  rectangle net GND: -211,-166 -148,-75
  rectangle net VH: -248,-1403 -98,-1251.36
  rectangle net GND: -156,-166 -106,-63
  rectangle net GND: -70.83,-167.55 -50,-156
  rectangle net GND: -83.52,-167.55 -70.83,-153.52
  pour cut-out: -152.44,-503.77 -106,-503.77 -106,-488 -152.44,-488
  region net VH: -250,-1356.68 -250,-1436 -536,-1722 -504.35,-1753.65 -342.92,-1753.65 -100,-1510.73 -100,-1347 -240.32,-1347

## Silkscreen, mask and mechanical layers (free items; w line width, h text height)
Top Overlay:
  lines w98.43: -2268.34,-13.16 ccw(c-2347.05,-15.15) -2268.31,-15.15 ; -2258.49,-1747.22 cw(c-2337.23,-1747.22) -2258.52,-1745.23 ; 63.56,-1754.51 ccw(c-15.15,-1756.5) 63.59,-1756.5
  text "GND" at -126,-71 h30
  text "ZZ201ECV02" at -2143,-90 h50
  text "NR" at -1570,-105 h30
  text "D-" at -1209,-168 h30
  text "G" at -903,-169 h30
  text "RX" at -818,-169 h30
  text "TX" at -719,-169 h30
  text "G" at -1396,-170 h30
  text "D+" at -1310,-170 h30
  text "VCC" at -1068,-170 h30
  text "BT0" at -619,-170 h30
  text "VCC" at -121,-300 h30
  text "PB8" at -1834,-328 h30
  text "PB9" at -1902,-383 h30
  text "TMS" at -1100,-403 h30
  text "TCK" at -1332,-420 h30
  text "PC9" at -758,-628 h30
  text "PC7" at -732,-695 h30
  text "PA1" at -2007,-1199 h30